# Altium PCB STm32f042_PCB.PcbDoc
Units mil, origin at the board's own origin, x right, y up, seen from the top; angles counter-clockwise.
Board outline 3500.65 x 1980.33 mil, 2 copper layers (Top Layer, Bottom Layer); 32 components, 31 nets, 220 pads, 29 vias.
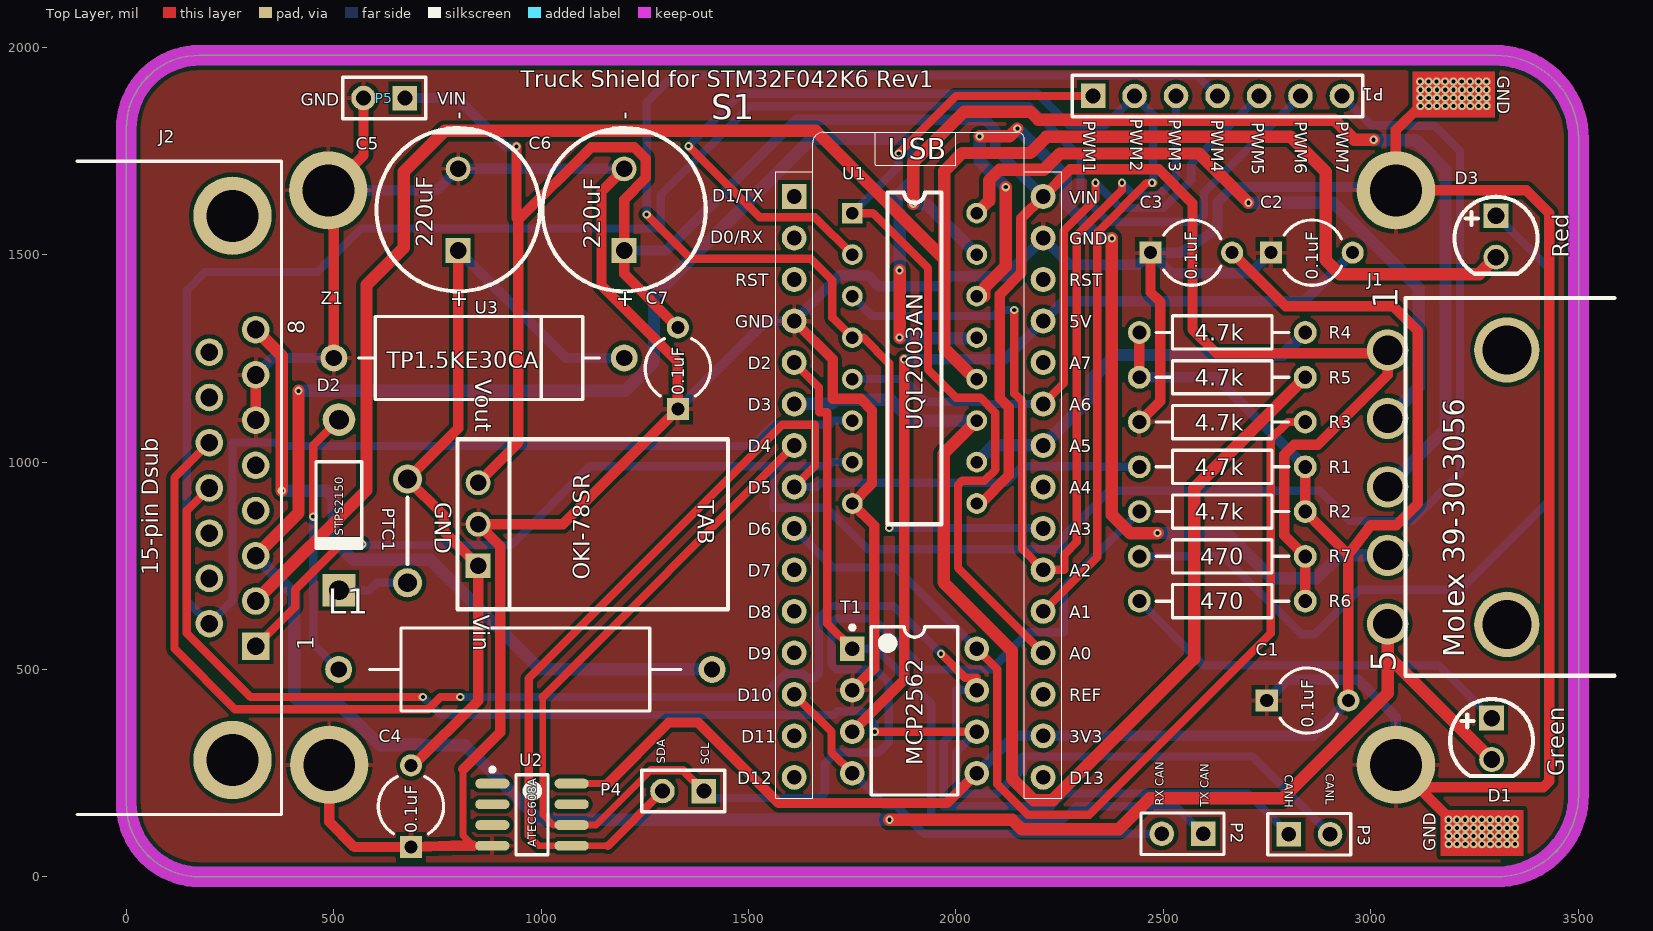
[diagram p0: Top Layer view]
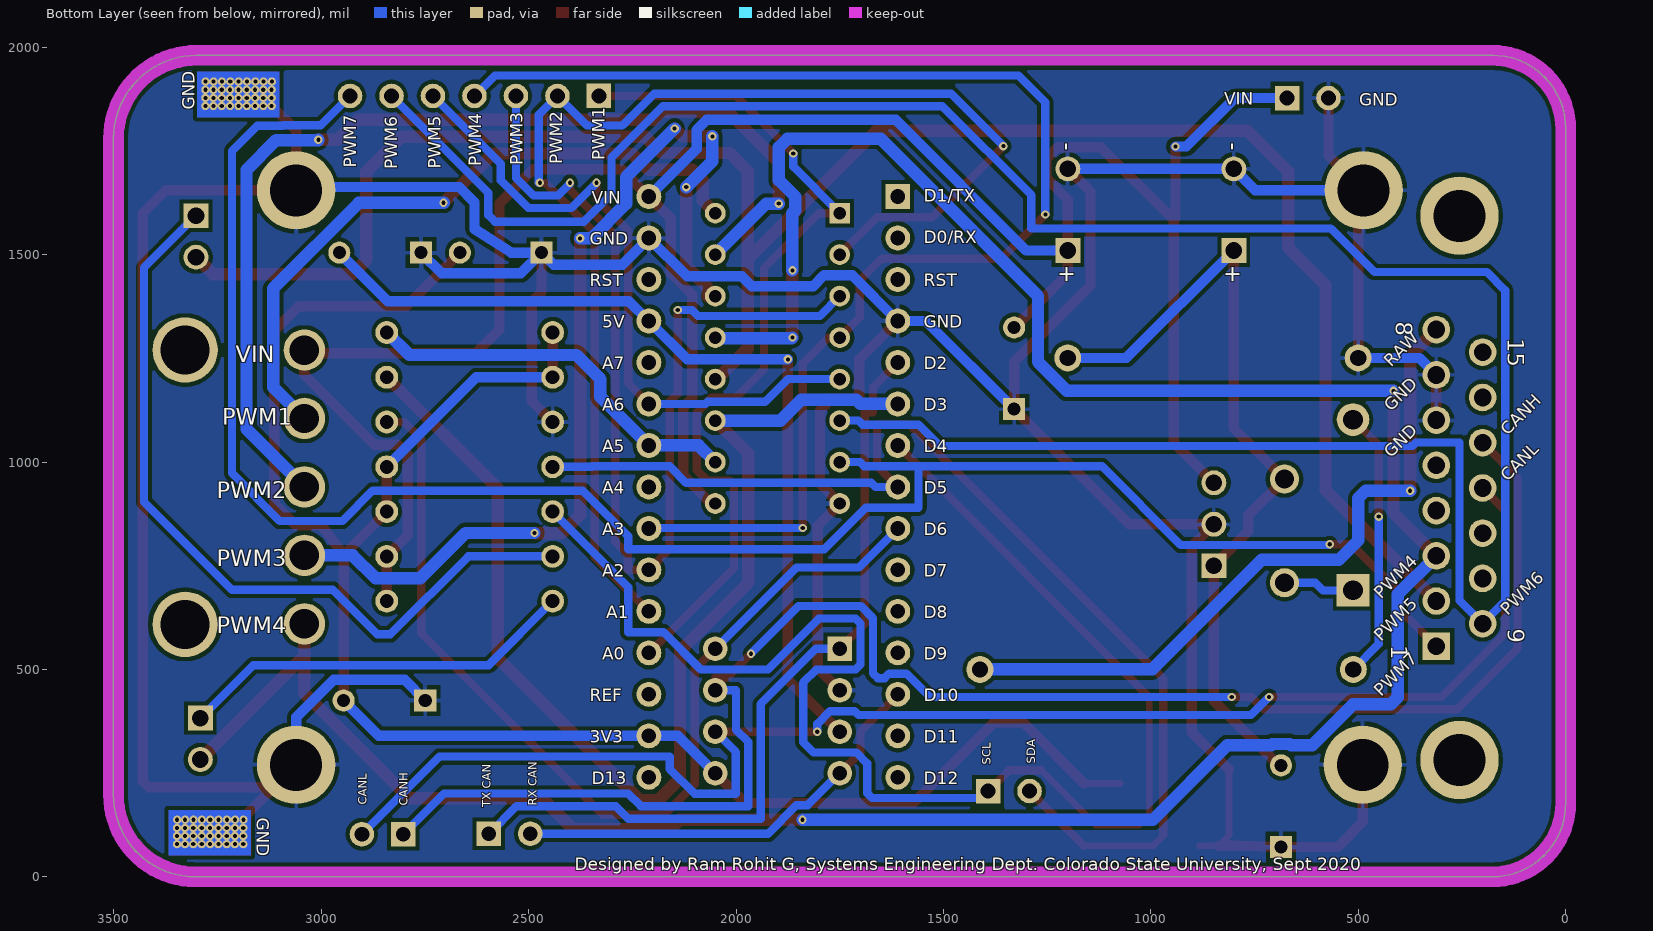
[diagram p1: Bottom Layer view, seen from below]

## Layer stack, top to bottom
Top Solder: solder mask 0.4, Solder Resist, Dk 3.5
Top Layer: signal copper 1.4
Dielectric 1: dielectric 12.6, FR-4, Dk 4.8
Bottom Layer: signal copper 1.4
Bottom Solder: solder mask 0.4, Solder Resist, Dk 3.5

## Board outline
3303.25,0 177.17,0 cw(c177.16,177.16) 0,177.17 0,1804.13 cw(c176.19,1804.13) 176.2,1980.33 3300.09,1980.33 cw(c3300.09,1779.77) 3500.65,1779.77 3500.65,197.39 cw(c3303.25,197.39)

## Design rules (kind name [scope] priority, off if disabled: settings)
Clearance [All] p1: gap=10 ignorepadtopadclearanceinfootprint=FALSE except(0: Arc-Hole Track-Hole SMDPad-Hole THPad-Hole Via-Hole Fill-Hole Poly-Hole Region-Hole Text-Hole)
PolygonConnect [All] p1: connectstyle=Relief reliefconductorwidth=10 reliefentries=4 polygonreliefangle="90 Angle" airgapwidth=10
RoomDefinition STM32f042_schematic [InComponentClass('STM32f042_schematic')] p1: confinementstyle=ConfineIn formatcopy=TRUE lockcomponents=FALSE outline 3774.34,45.89 14184.34,45.89 14184.34,1785.89 3774.34,1785.89
RoutingVias [All] p1: holewidth=10 width=20 viastyle="Through Hole" minholewidth=10 minwidth=20 maxholewidth=10 maxwidth=20
SMDNeckDown [All] p1: percent=70.000
SolderMaskExpansion [All] p1: expansion=4 istentingtop=FALSE
Width [InNetClass('Power')] p1: maxlimit=30 minlimit=20 preferedwidth=25 minimp=50.000000 maximp=50.000000 favimp=50.000000
Width Width_PWM [InNetClass('PWM_Out')] p2: maxlimit=30 minlimit=10 preferedwidth=30 minimp=50.000000 maximp=50.000000 favimp=50.000000
Width Width_all [All] p3: maxlimit=30 minlimit=20 preferedwidth=20 minimp=50.000000 maximp=50.000000 favimp=50.000000
30 further rules are at their usual default settings.

## Components (designator, comment, footprint, x,y, rotation, side; value= is the part's Value field where it differs from the comment)
C1 "0.1uF" CAPR5-4X5 2847.48,425.11 r0 top
C2 "0.1uF" CAPR5-4X5 2857.84,1504.8 r0 top
C3 "0.1uF" CAPR5-4X5 2567.32,1504.8 r0 top
C4 "0.1uF" CAPR5-4X5 686.18,170.33 r90 top
C5 "220uF" "Elec. Cap 5 x 10mm" 800,1509.82 r90 top
C6 "220uF" "Elec. Cap 5 x 10mm" 1200,1509.82 r90 top
C7 "0.1uF" CAPR5-4X5 1329.46,1225.81 r90 top
D1 "Green" "5mm Rad LED" 3292.3,330.79 r0 top
D2 "STPS2150" DO-41 512.62,896.47 r270 top
D3 "Red" "5mm Rad LED" 3302.91,1541.73 r0 top
J1 "Molex 39-30-3056" "5 POS MINI-FIT JR R/A Header" 3040.49,1270 r90 top
J2 "Vehicle Interface" DB15 200,938.53 r90 top
L1 "Inductor B82134" AXIAL-0.9 962.02,500 r180 top
P1 "Header 7" HDR1X7 2330.46,1882.41 r0 top
P2 "Header 2" HDR1X2 2595.85,103.85 r180 top
P3 "Header 2" HDR1X2 2801.8,102.89 r0 top
P4 "Header 2" HDR1X2 1392.41,206.82 r180 top
P5 "Header 2" HDR1X2 671.81,1877.46 r180 top
PTC1 "RKEF075" PTC 677.64,833.99 r90 top
R1 "4.7k" AXIAL-0.4 2641.92,988.49 r180 top
R2 "4.7k" AXIAL-0.4 2641.92,880.54 r180 top
R3 "4.7k" AXIAL-0.4 2641.92,1096.45 r180 top
R4 "4.7k" Axial-0.4 2641.92,1312.36 r180 top
R5 "4.7k" Axial-0.4 2641.92,1204.4 r180 top
R6 "470" AXIAL-0.4 2641.92,664.63 r180 top
R7 "470" AXIAL-0.4 2641.92,772.58 r180 top
S1 "ArduinoNano" "Arduino nano" 1550,1800 r270 top
T1 "MCP2562" DIP-8 1900,400 r0 top
U1 "UQL2003AN" DIP16 1750,1600 r0 top
U2 "ATECC608A" SOIC-8 977.89,150 r0 top
U3 "OKI-78SR" OKI-78SR 848,950 r270 top
Z1 "TP1.5KE30CA" DIODE-0.7 850.29,1250.87 r0 top

## Footprints (in the part's own frame and the unit in brackets; to place one, negate y for a bottom-side part, rotate by r counter-clockwise, add the part's x,y. Pads: shape width x height; smd on the part's side, far side on the other; paste and mask are expansions set on the pad)
"5 POS MINI-FIT JR R/A Header" [mil]
  round 157.48 hole 118.11: 0(-661.42,-287.4) 0(0,-287.4)
  round 100 hole 71: 1(0,0) 2(-165,0) 3(-330,0) 4(-495,0) 5(-660,0)
  silkscreen extent -785,-547 125,-43
"5mm Rad LED" [mil]
  rect 60x60 hole 40: 1(-1.11,52.06)
  round 60 hole 40: 2(-1.11,-47.94)
  silkscreen extent -101,-88 99,98
"Arduino nano" [mil] "arduino nano"
  rect 60x60 hole 35.43: 0(160,60)
  round 60 hole 35.43: 1(260,60) 2(360,60) 3(460,60) 4(560,60) 5(660,60) 6(760,60) 7(860,60) 8(960,60) 9(1060,60) 10(1160,60) 11(1260,60) 12(1360,60) 13(1460,60) 14(1560,60) 15(1560,660) 16(1460,660) 17(1360,660) 18(1260,660) 19(1160,660) 20(1060,660) 21(960,660) 22(860,660) 23(760,660) 24(660,660) 25(560,660) 26(460,660) 27(360,660) 28(260,660) 29(160,660)
  silkscreen extent 5,15 1610,705
AXIAL-0.4 [mm] "Axial Device, Thru-Hole; 2 Leads; 0.4 in Pin Spacing"
  round 1.4 hole 0.85: 1(-5.08,0) 2(5.08,0)
  silkscreen extent -4.06,-1.02 4.06,1.02
Axial-0.4 [mm] "Axial Device, Thru-Hole; 2 Leads; 0.4 in Pin Spacing"
  round 1.4 hole 0.85: 1(-5.08,0) 2(5.08,0)
  silkscreen extent -4.06,-1.02 4.06,1.02
AXIAL-0.9 [mm] "Axial Device, Thru-Hole; 2 Leads; 0.9 in Pin Spacing"
  round 1.65 hole 1: 1(-11.43,0) 2(11.43,0)
  silkscreen extent -9.52,-2.54 9.53,2.54
CAPR5-4X5 [mm] "Capacitor; 2 Leads"
  rect 1.35x1.35 hole 0.8: 1(-2.5,0)
  round 1.35 hole 0.8: 2(2.5,0)
  silkscreen extent -1.69,-2 1.82,2
DB15 [mm]
  rect 1.69x1.69 hole 1.09: 1(-9.72,-2.843)
  round 1.69 hole 1.09: 2(-6.95,-2.843) 3(-4.18,-2.843) 4(-1.41,-2.843) 5(1.36,-2.843) 6(4.13,-2.843) 7(6.9,-2.843) 8(9.67,-2.843) 9(-8.335,-0.003) 10(-5.565,-0.003) 11(-2.795,-0.003) 12(-0.025,-0.003) 13(2.745,-0.003) 14(5.515,-0.003) 15(8.285,-0.003)
  round 4.8 hole 3.18: 16(-16.685,-1.423) 17(16.635,-1.423)
  silkscreen extent -20.03,-4.42 19.97,8.08
DIODE-0.7 [mm] "Diode, Thru-Hole; 2 Leads; 0.7 in Pin Spacing"
  round 1.65 hole 1: 1(-8.89,0) 2(8.89,0)
  silkscreen extent -7.37,-2.54 7.37,2.54
DIP16 [mil]
  rect 50x50 hole 30: 1(0,0)
  round 50 hole 30: 2(0,-100) 3(0,-200) 4(0,-300) 5(0,-400) 6(0,-500) 7(0,-600) 8(0,-700) 9(300,-700) 10(300,-600) 11(300,-500) 12(300,-400) 13(300,-300) 14(300,-200) 15(300,-100) 16(300,0)
  silkscreen extent 85,-750 215,50
DIP-8 [mm] "DIP; 8 Leads; Row Spacing 7.62 mm; Pitch 2.54 mm"
  rect 1.5x1.5 hole 0.9: 1(-3.81,3.81)
  round 1.5 hole 0.9: 2(-3.81,1.27) 3(-3.81,-1.27) 4(-3.81,-3.81) 5(3.81,-3.81) 6(3.81,-1.27) 7(3.81,1.27) 8(3.81,3.81)
  silkscreen extent -3.93,-5.15 2.65,5.23, body extent -3.6,-5.15 3.6,5.15, height 5.08
DO-41 [mm] "Diode, Axial; Body 5.2 x 2.7 mm (LxDia. max), Lead Dia. 0.86 mm (max)"
  round 2 hole 1.2: 1(-5.23,0)
  rect 2x2 hole 1.2: 2(5.23,0)
  silkscreen extent -2.65,-1.4 2.75,1.4
"Elec. Cap 5 x 10mm" [mil] "2 lead polarized Radial Capacitor with 5 mm lead spacing and 10 mm diameter can"
  rect 60x60 hole 40: 1(0,0)
  round 60 hole 40: 2(196.85,0)
  silkscreen extent -98,-197 295,197
HDR1X2 [mm] "Connector; Header; 2 Position"
  rect 1.5x1.5 hole 0.9: 1(0,0)
  round 1.5 hole 0.9: 2(2.54,0)
  silkscreen extent -1.27,-1.27 3.81,1.27
HDR1X7 [mm] "Connector; Header; 7 Position"
  rect 1.5x1.5 hole 0.9: 1(0,0)
  round 1.5 hole 0.9: 2(2.54,0) 3(5.08,0) 4(7.62,0) 5(10.16,0) 6(12.7,0) 7(15.24,0)
  silkscreen extent -1.27,-1.27 16.51,1.27
OKI-78SR [mil] "Horizontal Mount SIP DC/DC Converter"
  rect 60x60 hole 40: 1(200,0)
  round 60 hole 40: 2(100,0) 3(0,0)
  silkscreen extent -105,-50 305,602
PTC [mil] "TE RGEF600-2"
  round 70 hole 45: 1(-125,0) 2(125,0)
  silkscreen extent -80,0 80,0
SOIC-8 [mm]
  oval 2.1x0.6 smd: 1(-2.425,1.905) 2(-2.425,0.635) 3(-2.425,-0.635) 4(-2.425,-1.905) 5(2.425,-1.905) 6(2.425,-0.635) 7(2.425,0.635) 8(2.425,1.905)
  silkscreen extent -2.55,-2.45 0.97,2.88

## Part data
C1 C2 C3: library part Cap, "0.1µF ±10% 50V Ceramic Capacitor X7R Radial", Manufacturer="TDK Corporation", PartNumber=FA28X7R1H104KNU00, Supplier Part Number 1=445-175529-ND, Alternative=Acceptable, Supplier 1=Digi-Key
C4 C7: library part Cap, "CAP CER 0.1UF 100V X7R RADIAL", Manufacturer="Vishay BC Components", PartNumber=K104K20X7RH53H5, Supplier Part Number 1=BC5139-ND, Supplier 1=Digi-Key
C5 C6: library part "Electrolytic Cap", "220µF 50V Aluminum Electrolytic Capacitors Radial, Can 175 mOhm @ 10kHz 5000 Hrs @ 105°C", Manufacturer="EPCOS (TDK)", PartNumber=B41858C6227M000, Supplier Part Number 1=495-6000-ND, Supplier 1=Digi-Key
D1: library part "LED - SMD", "Green 569nm LED Indication - Discrete 2.1V Radial", Manufacturer="Lite-On Inc.", PartNumber=LTL-4233, Supplier Part Number 1=160-1130-ND, Supplier 1=Digi-Key
D2: library part "Diode 1N4003", "Diode Schottky 150V 2A Through Hole DO-15", Manufacturer=STMicroelectronics, Supplier Part Number 1=497-3213-1-ND, PartNumber=STPS2150, Supplier 1=Digi-Key
D3: library part "LED - SMD", "Red 623nm LED Indication - Discrete 2V Radial", Manufacturer="Lite-On Inc.", PartNumber=LTL-4223, Supplier Part Number 1=160-1127-ND, Supplier 1=Digi-Key
J1: library part "5 Pos Header", "5 Positions Header Connector 0.165\" (4.20mm) Through Hole - Right Angle Tin", Manufacturer=Molex, PartNumber=39-30-3055, Supplier Part Number 1=WM18448-ND, Supplier 1=Digi-Key
J2: library part 788781-2, "Receptacle Assembly, 15 Position, Right Angle, 8.08mm Series, Amplimite, with Screwlocks", Manufacturer="Amphenol FCI", PartNumber=D15S33E4GX00LF, Supplier Part Number 1=609-1499-ND, Supplier 1=Digi-Key
L1: library part "Inductor Iron", "Magnetic-Core Inductor", Manufacturer="TDK Electronics Inc.", PartNumber=B82134A5701M000, Supplier Part Number 1=495-76036-1-ND, Supplier 1=Digi-Key
P1: "Header, 7-Pin", LatestRevisionDate=17-Jul-2002, LatestRevisionNote="Re-released for DXP Platform.", Publisher="Altium Limited"
P2 P3 P4 P5: "Header, 2-Pin", LatestRevisionDate=17-Jul-2002, LatestRevisionNote="Re-released for DXP Platform.", Publisher="Altium Limited"
PTC1: library part "SMD Resistor", "Polymeric PTC Resettable Fuse 60V 750mA Ih Through Hole Radial, Disc", Manufacturer="Littelfuse Inc.", Supplier Part Number 1=RKEF075HF-ND, PartNumber=RKEF075, Supplier 1=Digi-Key
R1 R2 R3: library part "Chip Resistor", "4.7 kOhms ±5% 0.25W, 1/4W Through Hole Resistor Axial Flame Retardant Coating, Safety Carbon Film", Manufacturer="Stackpole Electronics Inc", PartNumber=CF14JT4K70, Supplier Part Number 1=CF14JT4K70CT-ND, Alternative=Acceptable, Supplier 1=Digi-Key
R4 R5: library part "Chip Resistor", "RES SMD 4.7K OHM 1% 1/10W 0603", Manufacturer=Yageo, PartNumber=CFR-25JB-52-4K7, Supplier Part Number 1=4.7KQBK-ND, Supplier 1=Digi-Key
R6 R7: library part "Chip Resistor", "330 Ohms ±1% 0.1W, 1/10W Chip Resistor 0603 (1608 Metric) Automotive AEC-Q200, High Voltage Thick Film", Manufacturer="Stackpole Electronics Inc", PartNumber=CF14JT470R, Supplier Part Number 1=CF14JT470RCT-ND, Alternative=Acceptable, Supplier 1=Digi-Key
T1: library part MCP2558FD, "Microchip CAN FD Transceiver with Silent Mode", Manufacturer=Microchip, PartNumber=MCP2562-E/P, Supplier Part Number 1=MCP2562-E/P-ND, Supplier 1=Digi-Key
U1: library part ULQ2003, "High voltage, high current Darlington arrays each containing seven open collector Darlington pairswith common emitters."
U2: library part ATECC508A, "Authentication Chip IC Networking and Communications 8-SOIC", Manufacturer="Microchip Technology", PartNumber=ATECC608A-SSHDA-T, Supplier Part Number 1=ATECC608A-SSHDA-TCT-ND, Supplier 1=Digi-Key
U3: library part 7805, "5V DC/DC Converter (7805 replacement)", Manufacturer="Murata Power Solutions Inc.", PartNumber=OKI-78SR-5/1.5-W36H-C, Supplier Part Number 1=811-2692-ND, Supplier 1=Digi-Key
Z1: library part Zener, "TVS DIODE 25.6V 41.4V DO201", Manufacturer="Littelfuse Inc.", Supplier Part Number 1=F7610CT-ND, PartNumber=TP1.5KE30CA, Supplier 1=Digi-Key

## Free pads (board coordinates)
  round 188.98 hole 125.2: 0(487.06,1654.97) 0(489.19,270.16) 0(3060.49,270.16) 0(3060.49,1654.97)
  round 20 hole 10: 22(3118.94,1917.15) 22(3119.38,1858.27) 22(3119.38,1877.83) 22(3119.38,1897.38) 22(3139.13,1917.15) 22(3139.58,1858.27) 22(3139.58,1877.83) 22(3139.58,1897.38) 22(3158.73,1917.15) 22(3159.18,1858.27) 22(3159.18,1877.83) 22(3159.18,1897.38) 22(3178.93,1917.15) 22(3179.37,1858.27) 22(3179.37,1877.83) 22(3179.37,1897.38) 22(3187.4,137.82) 22(3187.84,78.94) 22(3187.84,98.49) 22(3187.84,118.05) 22(3198.93,1917.15) 22(3199.37,1858.27) 22(3199.37,1877.83) 22(3199.37,1897.38) 22(3207.6,137.82) 22(3208.04,78.94) 22(3208.04,98.49) 22(3208.04,118.05) 22(3219.12,1917.15) 22(3219.57,1858.27) 22(3219.57,1877.83) 22(3219.57,1897.38) 22(3227.19,137.82) 22(3227.64,78.94) 22(3227.64,98.49) 22(3227.64,118.05) 22(3239.32,1917.15) 22(3239.76,1858.27) 22(3239.76,1877.83) 22(3239.76,1897.38) 22(3247.39,137.82) 22(3247.83,78.94) 22(3247.83,98.49) 22(3247.83,118.05) 22(3259.52,1917.15) 22(3259.96,1858.27) 22(3259.96,1877.83) 22(3259.96,1897.38) 22(3267.39,137.82) 22(3267.83,78.94) 22(3267.83,98.49) 22(3267.83,118.05) 22(3278.72,1917.15) 22(3279.16,1858.27) 22(3279.16,1877.83) 22(3279.16,1897.38) 22(3287.58,137.82) 22(3288.03,78.94) 22(3288.03,98.49) 22(3288.03,118.05) 22(3307.78,137.82) 22(3308.23,78.94) 22(3308.23,98.49) 22(3308.23,118.05) 22(3327.98,137.82) 22(3328.42,78.94) 22(3328.42,98.49) 22(3328.42,118.05) 22(3347.18,137.82) 22(3347.62,78.94) 22(3347.62,98.49) 22(3347.62,118.05)

## Via types
v1: diameter 20, hole 10, Top Layer to Bottom Layer, 29 vias

## Nets (pads, with @x,y where several pads share a name; then routed paths per layer and width w, separated by ;. In a path a pad name is that pad's centre, name@x,y a point inside that pad or via, vN(x,y) a via of type N, cw(c..) or ccw(c..) an arc to the next point about the centre after c; other vN are vias at no path point)
3V3: C1.2 C3.2 R1.1 R2.1 R4.2 R5.2 S1.16 T1.5 U2.8 | length 4485.6
  Top Layer w16.54: U2.8 1160,225
  Top Layer w25: 1160,225 1307,372 1379,372 1573,178 1978,178 T1.5 ; R5.2 R4.2 ; C3.2 2795.05,1375.5 3053.5,1375.5 3113,1316 3113,900 3060.91,847.91 3000,847.91 2945.91,776.55 ; R1.1 R2.1 2945.91,776.55 ; C1.2 2945.91,776.55
  Bottom Layer w25: T1.5 2140,340 S1.16 2860.8,340 C1.2 ; R5.2 2626.01,1204.4 R1.1
12V0: C4.2 C5.1 PTC1.2 U3.1 Z1.2 | length 1940.2
  Top Layer w25: C4.2 691.89,268.76 848,424.87 U3.1 765,833 765,871.63 PTC1.2 800,1081.34 C5.1
  Bottom Layer w25: C5.1 1058.95,1250.87 Z1.2
+5: C2.2 S1.26 T1.3 | length 2137.1
  Top Layer w25: T1.3 1875,475 v1(1875,1247.5)
  Bottom Layer w25: v1(1875,1247.5) 2117.5,1247.5 S1.26 2258,1388 2839.46,1388 C2.2
CANH: J2.13 P3.1 T1.7 | length 4043.9
  Top Layer w20: J2.13 116,962.47 116,550 262.2,403.8 727.27,403.8 757.05,433.59 v1(805.12,433.59) ; v1(1964,538) 2022,480 2050,480 T1.7
  Bottom Layer w20: v1(805.12,433.59) 1532.88,433.59 1589.29,490 1630.71,490 1641.72,478.99 1658.28,478.99 1670,490.71 1670,623.44 1699.29,652.73 1849.27,652.73 v1(1964,538) ; T1.7 2000,450 2000,354.53 1970.47,325 1970.47,170.47 2229.47,170.47 2260,201 2703.68,201 P3.1
CANL: J2.12 P3.2 T1.6 | length 3597.4
  Top Layer w20: J2.12 146,883.42 146,587 299.2,433.8 v1(714.84,433.8) ; v1(1804.13,350) T1.6
  Bottom Layer w20: v1(714.84,433.8) 758.64,390 1704.92,390 1714.5,399.58 1773.42,399.58 1804.13,368.87 v1(1804.13,350) ; T1.6 2000.47,300.47 2000.47,200.47 2100,200.47 2160,260.47 2160,290 2714.68,290 P3.2
GND: C1.1 C2.1 C3.1 C4.1 C5.2 C6.2 C7.1 J2.6 J2.7 P5.2 pad.0 pad.22 R3.2 S1.3 S1.28 T1.2 U1.8 U2.4 U3.2 Z1.1 | length 11381.6
  Top Layer w16.54: 812,260 812,100 837,75 U2.4
  Top Layer w25: J2.6 J2.7 ; pad.0@489.19,270.16 489.19,132.72 550,71.91 C4.1 785.09,75 837,75 ; Z1.1 500.29,1641.73 487.06,1654.97 571.81,1739.72 P5.2 ; 812,260 901,349 901,797 U3.2 1052.08,850 C7.1 1329.46,1241.54 1145.52,1425.48 1145.52,1652.19 C6.2 ; S1.3 1702.5,1247.5 1702.5,1152.5 1770,1152.5 1797.5,1125 1797.5,947.5 U1.8 1803,847 1803,503 T1.2 ; R3.2 2492,1146.53 2492,1385.89 2468.89,1409 C3.1 ; pad.22@3119.38,1858.27 3060.49,1799.39 3060.49,1654.97 3375.03,1654.97 3430,1600 3430,230.64 3415.36,216 pad.0@3114.65,216 ; pad.22@3187.4,137.82 3180.9,144.32 3180.9,149.85 3137.75,193 3137.65,193 pad.0@3114.65,216 ; pad.0@3114.65,216 3060.49,216 3060.49,270.16 pad.0@3114.65,216
  Bottom Layer w25: J2.7 352.63,1250.87 Z1.1 ; pad.0@487.06,1654.97 748.3,1654.97 C5.2 C6.2 ; C7.1 1542.08,1340 S1.3 1720,1450 1788,1450 1814,1424 1962,1424 1986,1448 2118,1448 S1.28 2274.18,1475.82 2439.91,1475.82 C3.1 ; C1.1 2798.95,475 2969.98,475 3060.49,384.49 pad.0@3060.49,270.16 ; C2.1 2709.61,1455 2518.7,1455 C3.1 ; pad.0@3060.49,1654.97 3052.46,1663 2667,1663 2630.47,1626.47 2630.47,1561.53 2542,1504.8 C3.1
NetD1_1: D1.1 R6.2 | length 966
  Bottom Layer w20: R6.2 2596.05,510.5 3163.54,510.5 D1.1
NetD2_1: D2.1 L1.2 | length 653.3
  Top Layer w20: v1(450.81,868.4) 450.81,1040.56 D2.1
  Bottom Layer w20: v1(450.81,868.4) 450.81,561.21 L1.2
NetD2_2: D2.2 PTC1.1 | length 172.7
  Bottom Layer w20: D2.2 585,690.57 603.42,708.99 PTC1.1
NetD3_1: D3.1 R7.2 | length 1936.6
  Bottom Layer w20: R7.2 2645.42,772.58 2833,585 2865,585 2972,692 3215,692 3427,904 3427,1468.59 D3.1
PWM1: P1.1 S1.18 U1.1 | length 2136.1
  Top Layer w20: U1.1 1799.64,1600 1932.34,1467.3 1932.34,1222.66 2000,1155 2058.64,1155 2095,1118.64 2095,981.36 2068.64,955 2015,955 2005,945 2005,745 S1.18 ; v1(1861.99,1743.93) 2000.47,1882.41 P1.1
  Bottom Layer w20: U1.1 1861.99,1711.99 v1(1861.99,1743.93)
PWM1_OUT1: J1.2 U1.16 | length 1633.8
  Top Layer w30: U1.16 2079.8,1629.8 2079.8,1679.3 2105.5,1705 2212,1705 2250.75,1743.75 2586.25,1743.75 v1(2705,1625)
  Bottom Layer w30: v1(2705,1625) 2909.01,1625 3116,1418.01 3116,1180.51 J1.2
PWM1_OUT2: J1.3 U1.15 | length 2517.1
  Top Layer w30: v1(1896.9,1622.9) 1896.9,1721.9 2019.44,1844.44 2179.22,1844.44 2198.53,1825.12 2911.88,1825.12 2960.26,1776.74 v1(3006.72,1776.74)
  Bottom Layer w30: v1(1896.9,1622.9) 1927.1,1622.9 U1.15 ; v1(3006.72,1776.74) 3007.51,1775.94 3108.5,1775.94 3180,1704.44 3180,1079.51 J1.3
PWM1_OUT3: J1.4 U1.14 | length 2342.5
  Top Layer w30: U1.14 2067.75,1400 2067.75,1419.31 2119.8,1471.36 v1(2119.8,1662.73) ; v1(2057,1785) 2129,1785 v1(2148,1804) ; v1(2375.82,1539.22) 2375.82,872.31 2420.15,827.98 2484.98,827.98 v1(2486,829)
  Bottom Layer w30: v1(2057,1785) 2057,1725.53 v1(2119.8,1662.73) ; v1(2148,1804) 2265,1687 2265,1622.95 2348.73,1539.22 v1(2375.82,1539.22) ; v1(2486,829) 2652,829 2761,720 2869,720 2924,775 J1.4
PWM1_OUT4: D1.2 J1.5 J2.3 U1.13 | length 6749.9
  Top Layer w30: J2.3 415.11,877.13 v1(415.11,1171.56) ; v1(1839.49,137.69) 2135.53,137.69 2158.22,115 2393,115 2467,189 2787,189 3040.49,442.49 3040.49,533.54 ; v1(1864,1300) v1(1864,1462) ; J1.5 3040.49,533.54 ; D1.2 3040.49,533.54
  Bottom Layer w30: J2.3 404.48,681.39 404.48,433.21 422.05,415.64 512.7,415.64 610.7,317.63 662.12,317.63 664.82,320.33 707.55,320.33 710.25,317.63 815.37,317.63 995.31,137.69 v1(1839.49,137.69) ; v1(415.11,1171.56) 1202.27,1171.56 1272,1241.29 1272,1400 1650.93,1778.93 1876.49,1778.93 1896.99,1758.42 1896.99,1679.56 1856.9,1639.47 1856.9,1606.34 1864,1599.24 v1(1864,1462) ; v1(1864,1300) 1865.32,1298.68 2051.03,1298.68 2051.22,1298.49 U1.13
PWM1_OUT5: D3.2 J2.2 U1.12 | length 4834.5
  Top Layer w30: J2.2 579,931.97 579,1427 669,1517 669,1700 767.1,1798.1 1661.9,1798.1 1972,1488 ; U1.12 2045.36,1200 1972,1273.36 1972,1488 ; D3.2 3261.02,1453 2925,1453 2891,1487 2891,1700 2807.25,1783.75 2217.86,1783.75 2179.11,1745 2015,1745 1972,1702 1972,1488
PWM1_OUT6: R5.1 S1.5 U1.11 | length 2820.2
  Top Layer w30: U1.11 1970,1020 1970,710 2135,545 2135,237.22 2187.22,185 2232.78,185 2574,526.22 2574,936.48 R5.1
  Bottom Layer w30: S1.5 1700,1140 1710,1150 1843,1150 1893,1100 U1.11
PWM1_OUT7: R4.1 S1.23 U1.10 | length 946.5
  Bottom Layer w30: U1.10 2090,1040 S1.23 2327,1157 2327,1200 2385,1258 2787.56,1258 R4.1
PWM2: P1.2 S1.19 U1.2 | length 3072.5
  Top Layer w20: v1(1355.5,1761.5) 1527,1590 1660,1590 U1.2 ; S1.19 2340.82,770.82 2340.82,1553.72 2459.52,1672.42 v1@2475.82,1672.42
  Bottom Layer w20: v1(1355.5,1761.5) 1482,1888 2197,1888 2274,1811 2359.05,1811 P1.2 2475.82,1837.04 v1@2475.82,1672.42
  other v1: 2472.77,1673.18
PWM3: P1.3 S1.20 U1.3 | length 2468.3
  Top Layer w20: v1(2140.62,1366.45) 2140.62,1164.94 2160,1145.56 2160,790 S1.20 2261,740 2261,777 2291,807 2291,1546.32 2400.24,1655.56 v1@2400.24,1670.89
  Bottom Layer w20: U1.3 1797.74,1352.26 2091.46,1352.26 2105.64,1366.45 v1(2140.62,1366.45) ; v1@2400.24,1670.89 2428.71,1642.42 2488.25,1642.42 2530.45,1684.62 P1.3
  other v1: 2400.24,1673.18
PWM4: P1.4 S1.21 U1.4 | length 3248.3
  Top Layer w20: v1(1254.26,1596.74) 1361,1490 1650,1490 1702,1438 1702,1348 U1.4 1777,1300 1839,1238 v1(1839,841)
  Bottom Layer w20: v1(1254.26,1596.74) 1254.26,1867 1319.2,1931.94 2580.93,1931.94 P1.4 ; v1(1839,841) 2209,841 S1.21
PWM5: P1.5 S1.24 U1.5 | length 1625.2
  Top Layer w20: S1.24 2260,1190 2260,1557.75 2336.1,1633.85 v1(2336.1,1673.18)
  Bottom Layer w20: U1.5 1875,1200 1930,1145 2068.64,1145 2073.64,1140 S1.24 ; v1(2336.1,1673.18) 2396.86,1612.42 2500.68,1612.42 2567,1678.74 2567,1718.95 P1.5
PWM6: J2.9 P1.6 U1.6 | length 6048.2
  Bottom Layer w20: U1.6 1705,1100 1695,1090 1560,1090 1508.78,1038.78 369.22,1038.78 361.01,1047 256,1047 256,666.25 J2.9 146,664.47 146,1414 190,1458 461,1458 566,1563 1288,1563 1288,1643.13 1502.87,1858 2176.16,1858 2300,1734.16 2300,1645.88 2366.53,1579.36 2581.36,1579.36 2597,1595 2597,1648.95 P1.6
PWM7: J2.1 P1.7 U1.7 | length 4714.9
  Top Layer w20: J2.1 407.16,651.07 407.16,692.13 516.73,801.7 v1(568.9,801.7)
  Bottom Layer w20: v1(568.9,801.7) 570.6,800 928,800 1118,990 1560,990 ; U1.7 1701,1000 1691,990 1560,990 ; P1.7 3001.13,1811.74 3091.13,1811.74 3091.93,1810.94 3154.06,1810.94 3215,1750 3215,973 3100,858 2949,858 2876,931 2369.7,931 2260,821.3 2260,790 1787,790 1687,890 1560,890 1560,990
RAW: J2.8 L1.1 | length 1689.9
  Top Layer w30: J2.8 375.02,1256.12 v1(375.02,930.77)
  Bottom Layer w30: v1(375.02,930.77) 482.43,930.77 500,913.2 500,811 547,764 733,764 997,500 L1.1
RXCAN1: P2.2 S1.12 T1.4 | length 1054.4
  Top Layer w20: S1.12 1700,350 1700,300 T1.4
  Bottom Layer w20: T1.4 1827.31,172.69 1853.98,172.69 1922.82,103.85 P2.2
SCL0: P4.1 R2.2 S1.6 U2.6 | length 3583.3
  Top Layer w16.54: 1004,434 1004,150 1029,125 U2.6 1132,125 1264,257
  Top Layer w20: 1004,434 S1.6 ; 1264,257 1342.23,257 P4.1
  Bottom Layer w20: P4.1 1409.23,190 1672.15,190 1683.87,201.72 1683.87,273.87 1710,300 1813,300 1838,325 1838,468 1806,500 1711.72,500 1700,511.72 1700,611.02 1711.72,622.73 1800.27,622.73 1923,500 2085,500 2175,590 2260,590 2260,698.62 R2.2
SDA0: P4.2 R1.2 S1.7 U2.5 | length 2732.8
  Top Layer w16.54: 970,100 995,75 U2.5 1160.59,75
  Top Layer w20: 970,100 970,478 1582,1090 1660,1090 1660,990 S1.7 ; 1160.59,75 P4.2
  Bottom Layer w20: S1.7 1664,940 1674,950 2120,950 2160,990 2346,990 2347.51,988.49 R1.2
Silent: R3.1 S1.8 T1.8 | length 2346.6
  Top Layer w20: T1.8 2099.53,500.47 2099.53,223.19 2172.72,150 2322,150 2758.5,586.5 2758.5,1054.95 2800,1096.45 R3.1
  Bottom Layer w20: S1.8 1704.06,745.94 1854.06,745.94 1940.47,659.53 T1.8
TXCAN1: P2.1 S1.4 T1.1 | length 1976.8
  Top Layer w20: S1.4 1670,1180 1670,1120 1690,1120 1690,610 T1.1
  Bottom Layer w20: T1.1 1806.74,550 1940.47,416.27 1940.47,140.47 2260,140.47 2290,170.47 2529.23,170.47 P2.1
VIN: C6.1 C7.2 J1.1 P5.1 R6.1 R7.1 S1.29 U1.9 U3.3 | length 6100.8
  Top Layer w25: U3.3 945,1047 945,1583.74 ; v1(940.48,1760.6) 940.48,1588.26 945,1583.74 ; C7.2 1200,1453.69 C6.1 1200,1632.42 1252.5,1684.92 1252.5,1731.67 1225,1759.17 1120.43,1759.17 945,1583.74 ; U1.9 2059.6,900 2127.5,967.9 2127.5,1132.1 2105.25,1154.35 2105.25,1403.78 2157.3,1455.83 2157.3,1587.3 S1.29 2275.68,1705.68 2488.52,1705.68 2570,1624.2 2570,1320 2628,1262 J1.1@3040.49,1262 ; R6.1 R7.1 2791,823.5 2791,1018 2815,1042 2872,1042 3040.49,1210.49 J1.1@3040.49,1262 ; J1.1 J1.1@3040.49,1262
  Bottom Layer w25: P5.1 797.54,1877.46 914.4,1760.6 v1(940.48,1760.6) ; C6.1 1300,1509.82 1615.06,1824.88 2070.16,1824.88 2094.5,1800.53 2094.5,1755.5 S1.29
pads on no net: J1.0 J2.4 J2.5 J2.10 J2.11 J2.14 J2.15 J2.16 J2.17 S1.0 S1.1 S1.2 S1.9 S1.10 S1.11 S1.13 S1.14 S1.15 S1.17 S1.22 S1.25 S1.27 U2.1 U2.2 U2.3 U2.7

## Polygon pours and split planes (outlines as drawn)
GND on Top Paste "NONET_L-01_P-001" (solid): 2330,1860
GND on Bottom Layer "Bottom Layer-No Net" (solid, pour order 3): 3303.25,0 177.17,0 cw(c177.16,177.16) 0,177.17 0,1804.13 cw(c176.19,1804.13) 176.2,1980.33 3300.09,1980.33 cw(c3300.09,1779.77) 3500.65,1779.77 3500.65,197.39 cw(c3303.25,197.39)
GND on Top Layer "Top Paste-No Net" (solid, pour order 4): 3303.25,0 177.17,0 cw(c177.16,177.16) 0,177.17 0,1804.13 cw(c176.19,1804.13) 176.2,1980.33 3300.09,1980.33 cw(c3300.09,1779.77) 3500.65,1779.77 3500.65,197.39 cw(c3303.25,197.39)

## Keep-outs
Keep-Out Layer:
  the board outline again, w50

## Other copper
Top Layer:
  rectangle net GND: 3168.4,50.91 3367.99,161.53
  rectangle net GND: 3099.94,1830.24 3299.53,1940.86
  region: 2273.17,1745.5
Bottom Layer:
  rectangle net GND: 3168.68,51.61 3368.35,161.57
  rectangle net GND: 3100.21,1830.94 3299.89,1940.9

## Silkscreen, mask and mechanical layers (free items; w line width, h text height)
Top Overlay:
  text "GND" at 3304.52,1930.8 h30 r270
  text "Truck Shield for STM32F042K6 Rev1" at 951.03,1902.94 h39.37
  text "VIN" at 750,1861.51 h30
  text "GND" at 420.85,1858.41 h30
  text "PWM2" at 2419.7,1827.67 h30 r270
  text "PWM3" at 2513.15,1826.53 h30 r270
  text "PWM4" at 2614.93,1825.33 h30 r270
  text "PWM1" at 2306.36,1822.74 h30 r270
  text "PWM7" at 2916.64,1821.98 h30 r270
  text "PWM6" at 2816.98,1821.04 h30 r270
  text "PWM5" at 2713.22,1818.49 h30 r270
  text "SDA" at 1299.43,272.18 h20 r90
  text "SCL" at 1405.16,269.84 h20 r90
  text "CANL" at 2891.38,248.78 h20 r270
  text "CANH" at 2792.93,246.65 h20 r270
  text "RX CAN" at 2501.13,171.49 h20 r90
  text "TX CAN" at 2609.85,169.22 h20 r90
  text "GND" at 3156.41,61.27 h30 r90
Bottom Overlay:
  text "VIN" at 823.43,1861.51 h30
  text "GND" at 497.72,1858.41 h30
  text "GND" at 3305.33,1849.22 h30 r270
  text "PWM1" at 2316.59,1727.2 h30 r270
  text "PWM2" at 2419.32,1717.52 h30 r270
  text "PWM3" at 2514.3,1715.99 h30 r270
  text "PWM4" at 2613.85,1713.22 h30 r270
  text "PWM7" at 2915.56,1709.87 h30 r270
  text "PWM5" at 2712.14,1706.38 h30 r270
  text "PWM6" at 2816.98,1705.47 h30 r270
  text "VIN" at 3205.41,1240.75 h40
  text "RAW" at 420.79,1227.32 h30 r315
  text "GND" at 420.79,1119.49 h30 r315
  text "PWM1" at 3238.73,1089.44 h40
  text "CANH" at 139.81,1061.69 h30 r315
  text "GND" at 420.79,1007.65 h30 r315
  text "CANL" at 139.81,951.14 h30 r315
  text "PWM2" at 3252.06,912.9 h40
  text "PWM3" at 3252.06,748.98 h40
  text "PWM4" at 444.65,667.57 h30 r315
  text "PWM6" at 139.81,628.24 h30 r315
  text "PWM4" at 3252.06,587.35 h40
  text "PWM5" at 444.65,566.17 h30 r315
  text "PWM7" at 444.65,432.98 h30 r315
  text "SDA" at 1279.04,272.25 h20 r270
  text "SCL" at 1385.71,270.84 h20 r270
  text "CANL" at 2890.35,173.74 h20 r270
  text "RX CAN" at 2480.01,171.78 h20 r270
  text "CANH" at 2791.9,171.6 h20 r270
  text "TX CAN" at 2590.83,167.4 h20 r270
  text "GND" at 3155.61,142.85 h30 r90
  text "Designed by Ram Rohit G, Systems Engineering Dept. Colorado State University, Sept 2020" at 2388.58,15.82 h30
Bottom Paste:
  rectangle: 3169.61,51.5 3369.75,161.31
  rectangle: 3101.14,1830.83 3301.29,1940.65
Top Solder:
  rectangle: 3168.66,50.56 3368.94,162.47
  rectangle: 3100.2,1829.89 3300.48,1941.81
Bottom Solder:
  rectangle: 3169.98,51.87 3369.38,161.32
  rectangle: 3101.52,1831.2 3300.92,1940.65
Mechanical 1:
  lines w10: 0,177.16 ccw(c177.16,177.16) 177.17,0 ; 0,177.16 ccw(c177.16,177.16) 177.17,0 ; 0,177.16 ccw(c177.16,177.16) 177.17,0 ; 0,177.17 0,1804.13 ; 0,177.17 0,1804.13 ; 0,177.17 0,1804.13 ; 0,1804.13 cw(c176.19,1804.13) 176.19,1980.33 ; 0,1804.13 cw(c176.19,1804.13) 176.19,1980.33 ; 0,1804.13 cw(c176.19,1804.13) 176.19,1980.33 ; 176.2,1980.33 3300.09,1980.33 ; 176.2,1980.33 3300.09,1980.33 ; 176.2,1980.33 3300.09,1980.33 ; 177.17,0 3303.25,0 ; 177.17,0 3303.25,0 ; 177.17,0 3303.25,0 ; 3300.09,1980.33 cw(c3300.09,1779.77) 3500.65,1779.77 ; 3300.09,1980.33 cw(c3300.09,1779.77) 3500.65,1779.77 ; 3300.09,1980.33 cw(c3300.09,1779.77) 3500.65,1779.77 ; 3303.25,0 ccw(c3303.25,197.39) 3500.65,197.39 ; 3303.25,0 ccw(c3303.25,197.39) 3500.65,197.39 ; 3303.25,0 ccw(c3303.25,197.39) 3500.65,197.39 ; 3500.65,197.39 3500.65,1779.77 ; 3500.65,197.39 3500.65,1779.77 ; 3500.65,197.39 3500.65,1779.77
Board Outline:
  the board outline again, w10

## Dimensions
176.19,1980.33 to 3500.65,197.39 on Mechanical 13

## Text inside footprints (layer, text, board x,y; h text height)
C5: Top Overlay "+" at 820,1369.82 h40 r90; Top Overlay "-" at 820,1824.82 h40 r90; Bottom Overlay "-" at 820,1749.82 h40 r90; Bottom Overlay "+" at 820,1429.82 h40 r90
C6: Top Overlay "+" at 1220,1369.82 h40 r90; Top Overlay "-" at 1220,1824.82 h40 r90; Bottom Overlay "-" at 1220,1749.82 h40 r90; Bottom Overlay "+" at 1220,1429.82 h40 r90
J1: Top Overlay "1" at 3065.49,1370 h60 r90; Top Overlay "5" at 3060.49,495 h60 r90
J2: Top Overlay "1" at 451.88,545.99 h40 r90; Top Overlay "8" at 430,1308.53 h40 r90; Top Overlay "15-pin Dsub" at 77,727.53 h40 r90; Bottom Overlay "8" at 410,1338.53 h40 r90; Bottom Overlay "1" at 420,558.53 h40 r90; Bottom Overlay "15" at 140,1298.53 h40 r90; Bottom Overlay "9" at 140,598.53 h40 r90; Mechanical 1 "edge" at -63,1557.53 h40 r90; Mechanical 1 "edge" at -63,167.53 h40 r90
S1: Top Overlay "USB" at 1835,1730 h50; Top Overlay "VIN" at 2272.87,1622.87 h30; Top Overlay "GND" at 2272.87,1523.58 h30; Top Overlay "RST" at 2272.87,1423.55 h30; Top Overlay "5V" at 2272.87,1323.51 h30; Top Overlay "A7" at 2272.87,1223.48 h30; Top Overlay "A6" at 2272.87,1123.45 h30; Top Overlay "A5" at 2272.87,1023.42 h30; Top Overlay "A4" at 2272.87,923.38 h30; Top Overlay "A3" at 2272.87,823.35 h30; Top Overlay "A2" at 2272.87,723.32 h30; Top Overlay "A1" at 2272.87,623.29 h30; Top Overlay "A0" at 2272.87,523.25 h30; Top Overlay "REF" at 2272.87,423.22 h30; Top Overlay "3V3" at 2272.87,323.19 h30; Top Overlay "D13" at 2272.87,223.16 h30; Top Overlay "D1/TX" at 1412.89,1627.87 h30; Top Overlay "D0/RX" at 1407.89,1527.87 h30; Top Overlay "RST" at 1467.87,1423.55 h30; Top Overlay "GND" at 1467.87,1323.51 h30; Top Overlay "D2" at 1497.86,1223.48 h30; Top Overlay "D3" at 1497.86,1123.45 h30; Top Overlay "D4" at 1497.86,1023.42 h30; Top Overlay "D5" at 1497.86,923.38 h30; Top Overlay "D6" at 1497.86,823.35 h30; Top Overlay "D7" at 1497.86,723.32 h30; Top Overlay "D8" at 1497.86,623.29 h30; Top Overlay "D9" at 1497.86,523.25 h30; Top Overlay "D10" at 1472.87,423.22 h30; Top Overlay "D11" at 1482.86,323.19 h30; Top Overlay "D12" at 1472.87,223.16 h30; Bottom Overlay "A6" at 2322.85,1123.45 h30; Bottom Overlay "A5" at 2322.85,1023.42 h30; Bottom Overlay "A2" at 2322.85,723.32 h30; Bottom Overlay "A1" at 2312.85,623.29 h30; Bottom Overlay "GND" at 2352.84,1523.58 h30; Bottom Overlay "RST" at 2352.84,1423.55 h30; Bottom Overlay "3V3" at 2352.84,323.19 h30; Bottom Overlay "D13" at 2347.84,223.16 h30; Bottom Overlay "5V" at 2322.85,1323.51 h30; Bottom Overlay "A7" at 2322.85,1223.48 h30; Bottom Overlay "A4" at 2322.85,923.38 h30; Bottom Overlay "A3" at 2322.85,823.35 h30; Bottom Overlay "A0" at 2322.85,523.25 h30; Bottom Overlay "VIN" at 2347.85,1622.87 h30; Bottom Overlay "REF" at 2352.84,423.22 h30; Bottom Overlay "RST" at 1547.84,1423.55 h30; Bottom Overlay "D4" at 1547.84,1023.42 h30; Bottom Overlay "D8" at 1547.84,623.29 h30; Bottom Overlay "D12" at 1547.84,223.16 h30; Bottom Overlay "D1/TX" at 1547.84,1627.87 h30; Bottom Overlay "GND" at 1547.84,1323.51 h30; Bottom Overlay "D2" at 1547.84,1223.48 h30; Bottom Overlay "D3" at 1547.84,1123.45 h30; Bottom Overlay "D5" at 1547.84,923.38 h30; Bottom Overlay "D7" at 1547.84,723.32 h30; Bottom Overlay "D6" at 1547.84,823.35 h30; Bottom Overlay "D10" at 1547.84,423.22 h30; Bottom Overlay "D11" at 1547.84,323.19 h30; Bottom Overlay "D0/RX" at 1547.84,1527.87 h30; Bottom Overlay "D9" at 1547.84,523.25 h30
U3: Top Overlay "GND" at 744,903 h40 r270; Top Overlay "Vout" at 841,1199 h40 r270; Top Overlay "TAB" at 1378,908 h40 r270; Top Overlay "Vin" at 836,632 h40 r270